# Altium PCB Misko 3.PcbDoc (part 2 of 4)
Units mm, origin at the board's own origin, x right, y up, seen from the top; angles counter-clockwise.
Board outline 128.1 x 53.3 mm, 6 copper layers (Top (LS), Mid 1 (LS), Mid 2 (GND), Mid 3 (P/HS), Mid 4 (GND), Bottom (HS)), stack 1.597 mm thick; 230 components, 214 nets, 896 pads, 500 vias.
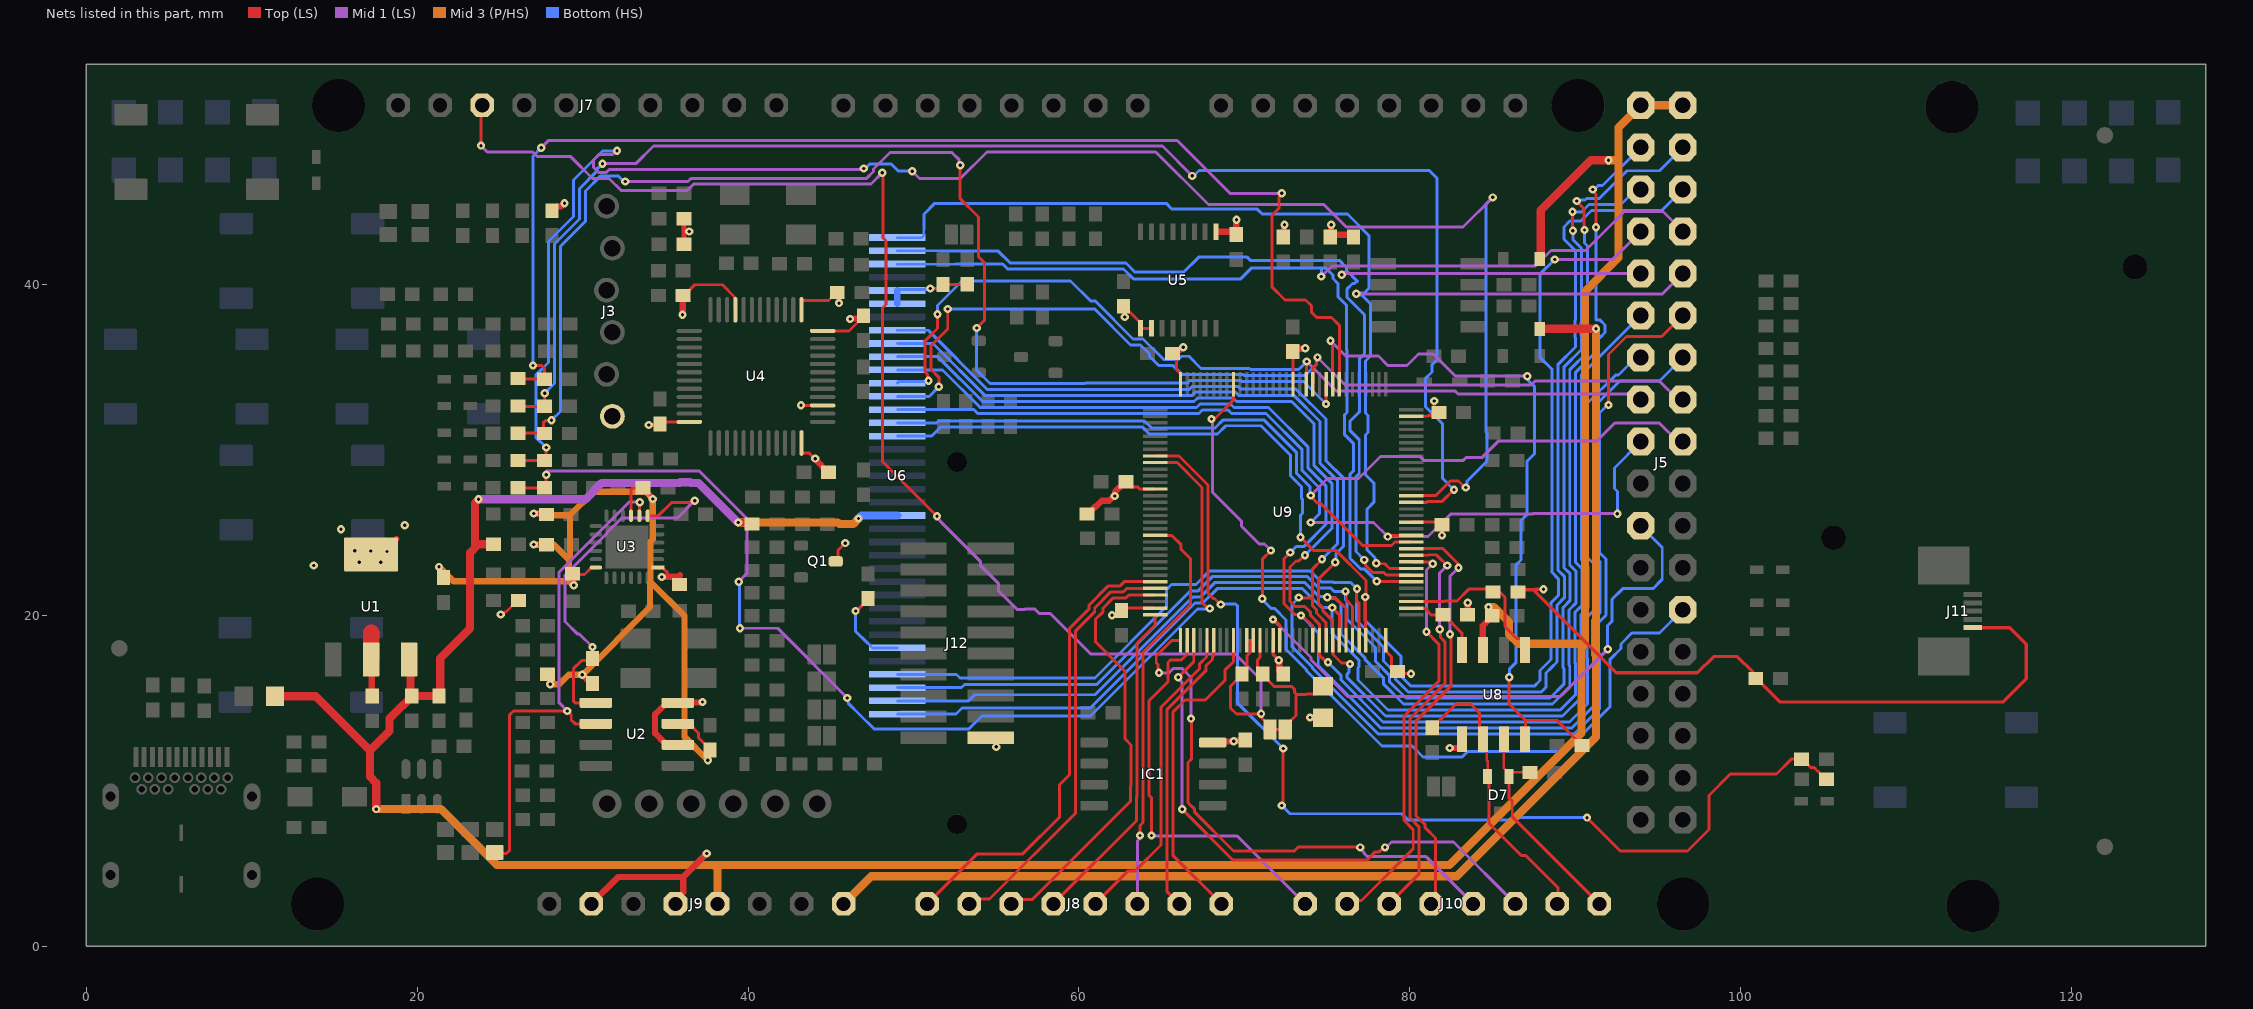
[diagram p6: the nets of this part, all layers, seen from the top]

## Via types
v1: diameter 0.5, hole 0.2, Top (LS) to Bottom (HS), tented both sides, 500 vias

## Nets (pads, with @x,y where several pads share a name; then routed paths per layer and width w, separated by ;. In a path a pad name is that pad's centre, name@x,y a point inside that pad or via, vN(x,y) a via of type N, cw(c..) or ccw(c..) an arc to the next point about the centre after c; other vN are vias at no path point)
+3V3: C17.2 C18.2 C19.2 C20.2 C21.2 C27.2 C28.2 C29.2 C30.2 C39.2 C53.2 C54.2 C55.2 C56.2 C57.2 C58.2 C59.2 C60.2 FB2.2 IC1.8 J3.6 J9.2 J9.4 J11.5 J12.1 Q1.3 R26.1 R41.1 R47.2 R52.2 R57.1 R58.1 R59.1 R62.1 R63.1 R93.1 R95.1 U2.6 U2.8 U4.1 U4.9 U4.24 U4.36 U4.39 U4.48 U5.1 U5.9 U5.10 U6.6 U6.32 U6.33 U8.5 U9.13 U9.31 U9.47 U9.64 U9.79 U9.95 U9.111 U9.128 | length 129.1
  Top (LS) w0.18: v1(34,31.5) 34.617,31.5 C18.2@34.675,31.557 34.8,31.682 U4.24@36.456,31.682 ; C19.2@36.078,39.321 36.128,39.321 36.778,39.97 38.455,39.97 39.218,39.208 39.218,38.471 U4.9@39.231,38.457 ; v1(43.2,32.682) U4.39@44.506,32.682 ; U4.36@43.231,30.407 43.231,29.843 43.264,29.811 43.672,29.811 44.019,29.464 v1(44.06,29.464) ; U4.1@43.231,38.457 43.231,38.985 43.264,39.017 44.856,39.017 45.34,39.502 C20.2@45.39,39.502 ; U4.48@44.506,37.182 46.106,37.182 C21.2@46.828,37.904 ; Q1.3@45.441,23.371 45.441,23.922 v1(45.876,24.356) ; v1(51.01,39.748) 51.51,39.748 51.528,39.73 51.798,40 R52.2@53.25,40 ; J12.1@54.665,12.6 54.72,12.6 55,12.32 v1(55,12.04) ; v1(62,20) 62.28,20 62.703,20.423 U9.31@64.598,20.423 ; C28.2@62.687,38.671 62.687,38.621 62.997,38.311 63.089,38.311 63.725,37.675 U5.9@63.725,37.332 U5.10@64.375,37.332 ; C57.2@62.864,27.982 63.097,27.749 63.557,27.749 63.673,27.633 64.588,27.633 U9.13@64.598,27.623 ; C58.2@65.6,35.581 65.81,35.581 65.879,35.511 65.879,34.855 66.126,34.609 66.126,33.971 U9.128@66.136,33.961 ; U9.47@71.736,18.485 71.736,17.616 v1(72.077,17.274) 72.077,16.712 C56.2@72.345,16.444 ; U9.111@72.936,33.961 72.936,35.929 C59.2@72.944,35.938 ; U9.64@78.536,18.485 78.546,18.475 78.546,17.837 78.89,17.493 78.89,16.91 79.2,16.6 C54.2@79.25,16.6 79.445,16.405 79.509,16.469 v1(80.069,16.469) ; U9.79@80.074,25.623 81.79,25.623 82,25.413 81.935,25.348 v1(81.935,24.823) ; U9.95@80.074,32.023 81.043,32.023 81.092,32.072 81.508,32.072 C60.2@81.718,32.282 ; v1(81.47,32.95) 81.47,32.53 C60.2@81.75,32.25
  Top (LS) w0.2: v1(46.5,20.25) 46.55,20.25 47.25,20.95 C30.2@47.25,21 ; R63.1@86.524,21.395 86.66,21.532 87.549,21.532 87.586,21.569 v1(88.069,21.569) ; 87.461,21.532 92.478,16.515 97.373,16.515 98.359,17.5 99.796,17.5 100.728,16.568 100.728,16.34 C39.2@100.9,16.168 100.95,16.168 102.368,14.75 115.843,14.75 117.25,16.157 117.25,18.25 116.25,19.25 J11.5@114.013,19.25
  Top (LS) w0.3: R41.1@36.128,42.414 36.128,43.187 ; R26.1@36.128,43.96 36.128,43.187 ; v1(36.445,43.187) 36.128,43.187
  Top (LS) w0.381: R47.2@28.152,44.443 28.152,44.493 28.362,44.703 28.681,44.703 28.878,44.9 v1(28.91,44.9) ; J9.2@30.534,2.554 32.161,4.18 36.08,4.18 ; J9.4@35.614,2.554 35.614,2.798 36.08,3.264 36.08,4.18 ; U2.6@35.791,12.192 35.708,12.274 34.961,12.274 34.38,12.855 34.38,14.015 35.115,14.75 35.277,14.75 35.299,14.728 37.227,14.728 v1(37.25,14.75) ; v1(36.043,38.164) 36.06,38.181 36.06,39.253 C19.2@36.128,39.321 ; v1(37.5,5.6) 36.08,4.18 ; v1(44.06,29.464) 44.083,29.441 44.083,29.383 44.82,28.646 C17.2@44.87,28.646 ; C20.2@45.39,39.502 45.477,39.414 45.477,38.885 v1(45.5,38.862) ; v1(46.167,37.906) 46.19,37.929 46.803,37.929 C21.2@46.97,38.096 ; R93.1@60.537,26.123 60.967,26.553 61.015,26.553 61.375,26.914 61.832,26.914 62.122,27.203 v1(62.154,27.203) 62.177,27.226 62.177,27.449 62.787,28.059 C57.2@62.837,28.059 ; C58.2@65.645,35.821 65.854,36.031 66.104,36.031 66.263,36.189 v1(66.295,36.189) ; IC1.8@68.084,12.305 68.146,12.367 69.326,12.367 69.372,12.412 70.001,12.412 R95.1@70.049,12.46 ; 68.427,43.168 69.653,43.168 C27.2@69.713,43.108 ; C27.2@69.44,43.31 69.513,43.383 69.513,43.887 v1(69.525,43.9) ; v1(72.077,17.274) 72.098,17.253 C56.2@72.098,16.577 ; R57.1@72.347,42.847 72.394,42.894 72.394,43.577 v1(72.417,43.6) ; C59.2@72.931,35.925 72.936,35.929 73.118,36.112 73.648,36.112 v1(73.671,36.134) ; v1(73.964,13.814) 73.971,13.807 74.743,13.807 FB2.2@74.75,13.8 ; R58.1@75.18,42.847 75.227,42.894 75.227,43.577 v1(75.25,43.6) ; R58.1@75.25,43 R59.1@76.667,43 ; v1(82.4,11.972) 83.091,11.972 83.138,12.019 U8.5@83.138,12.494 ; R62.1@83.491,20.023 v1(83.491,20.748)
  Bottom (HS) w0.15: U6.33@49.022,39.623 U6.33@49.085,39.686 ; v1@50.948,39.686 v1(51.01,39.748)
  Bottom (HS) w0.18: v1(46.5,20.25) 46.5,19.035 47.202,18.333 47.212,18.333 47.522,18.023 U6.6@49.022,18.023 ; v1@50.924,39.748 v1(51.01,39.748)
  Bottom (HS) w0.2: U6.33@49.085,39.686 v1@50.948,39.686
  Bottom (HS) w0.4: U6.32@49.022,38.823 U6.33@49.022,39.623
  other v1: 69.349,12.39 62.772,38.02
+3V3HUB: C6.2 C7.2 C8.2 C14.2 C15.2 C16.2 R6.1 R8.2 R15.2 R17.1 R18.2 U1.2 U1.4 U2.7 U3.1 U3.9 U3.18 | length 72.2
  Top (LS) w0.18: v1(25.05,20.038) 25.136,20.038 25.286,20.188 25.367,20.188 26.067,20.888 R6.1@26.117,20.888 ; v1(27.043,26.151) 27.751,26.151 R17.1@27.809,26.093 ; v1(27.051,24.277) 27.805,24.277 R18.2@27.825,24.257 ; C14.2@29.381,22.504 29.402,22.483 29.431,22.454 30.116,22.454 30.526,22.863 30.786,22.863 U3.18@30.806,22.882 ; U3.9@32.931,26.008 32.931,26.594 32.92,26.605 32.92,27.595 33.025,27.7 C15.2@33.65,27.7 ; C15.2@33.657,27.743 34.178,27.222 34.178,27.087 v1(34.239,27.026) ; U3.1@34.557,22.882 34.587,22.853 34.847,22.853 35.141,22.559 35.141,22.435 ; U2.7@35.755,13.435 36.44,13.435 37.01,12.865 37.01,12.59 37.68,11.92 C8.2@37.68,11.87
  Top (LS) w0.381: U1.4@17.081,23.626 17.377,23.626 v1(17.803,23.2) ; U1.2@17.219,17.325 17.25,17.294 17.25,15.155 C6.2@17.282,15.123 ; U1.4@17.883,23.12 17.883,23.739 U1.4@18.75,24.606 ; R8.2@27.882,16.436 28.019,16.299 28.019,15.846 v1(28.042,15.823) ; C14.2@29.402,22.483 29.449,22.436 29.449,21.826 v1(29.472,21.804) ; v1(29.982,16.406) 29.994,16.406 30.6,15.8 R15.2@30.6,15.75 ; v1(34.782,22.309) 34.805,22.332 35.807,22.332 35.889,22.414 ; v1(37.573,11.227) 37.596,11.25 37.596,11.746 C8.2@37.7,11.85 C8.2@37.68,11.87
  Top (LS) w1: U1.2@17.219,17.325 17.219,18.949
  Mid 3 (P/HS) w0.381: v1(21.326,22.919) 22.198,22.047 29.178,22.047 ; v1(27.043,26.151) 28.097,26.151 28.213,26.035 29.235,26.035 ; v1(27.051,24.277) 27.071,24.257 28.271,24.257 29.178,23.35 ; v1@28.074,15.823 28.576,15.823 29.159,16.406 30.002,16.406 34.07,20.474 34.07,21.991 34.1,22.021 ; v1(29.472,21.804) 29.44,21.804 29.196,22.047 29.178,22.047 ; v1(37.573,11.227) 36.16,12.641 36.16,19.962 34.1,22.021 ; 29.178,22.047 29.178,23.35 ; 29.178,23.35 29.235,23.407 29.235,26.035 ; 29.235,26.035 30.669,27.47 33.815,27.47 34.227,27.058 34.239,27.058 34.239,24.577 34.1,24.438 34.1,22.021
  other v1: 13.75,23 16.5,23.2 18.18,23.848 17.203,23.875 16.225,23.902 15.4,25.2 19.25,25.432
+5: C4.2 C5.2 C38.2 D3.2 FB1.2 J5.1 J5.2 J9.5 R14.2 R32.1 U1.3 U6.16 U8.3 | length 201.9
  Top (LS) w0.381: U8.3@84.408,17.894 84.408,19.359 C38.2@85.072,20.023 ; v1(84.75,20.5) 84.773,20.477 84.773,20.322 C38.2@85.072,20.023 ; C38.2@85.122,20.023 C38.2@85.072,20.023
  Top (LS) w0.5: FB1.2@11.418,15.1 13.88,15.1 17.152,11.828 ; v1(17.526,8.28) 17.526,9.867 17.152,10.241 17.152,11.828 ; U1.3@19.519,17.325 19.594,17.25 19.594,14.998 19.119,14.523 19.082,14.523 18.33,13.771 18.33,13.007 17.578,12.254 17.152,11.828 ; C4.2@19.669,15.123 19.682,15.123 19.685,15.121 21.321,15.121 C5.2@21.323,15.119 21.39,15.185 21.39,17.39 23.191,19.191 23.191,20.296 23.2,20.305 23.2,23.773 23.716,24.29 R14.2@24.616,24.29 ; 23.5,24.29 23.5,26.787 v1(23.713,27) ; v1(39.4,25.6) 40.156,25.6 R32.1@40.239,25.517 ; D3.2@87.859,41.524 87.915,41.58 87.915,44.475 90.94,47.5 v1(92,47.5)
  Mid 1 (LS) w0.5: v1(23.713,27) 30.171,27 31.157,27.986 35.853,27.986 35.905,28.038 36.485,28.038 36.537,27.986 37.014,27.986 v1(39.4,25.6)
  Mid 3 (P/HS) w0.5: v1(17.526,8.28) 21.433,8.28 24.813,4.9 37.954,4.9 ; J9.5@38.154,2.554 38.154,4.7 37.954,4.9 ; v1(39.4,25.6) 45.426,25.6 45.517,25.509 46.359,25.509 46.68,25.83 v1(46.68,25.844) ; v1(84.75,20.5) 85.071,20.5 85.987,19.583 85.987,18.839 86.549,18.278 88.559,18.278 88.565,18.272 90.575,18.272 ; v1(92,47.5) 92.577,47.5 92.61,47.533 ; J5.2@96.492,50.813 J5.1@93.952,50.813 92.61,49.47 92.61,47.533 ; 37.954,4.9 82.394,4.9 90.366,12.872 90.366,18.013 90.575,18.223 90.575,18.272 ; 90.575,18.272 90.575,36.996 90.55,37.021 90.55,37.601 90.575,37.626 90.575,39.575 92.61,41.61 92.61,47.533
  Bottom (HS) w0.5: v1(46.68,25.844) 46.86,26.023 U6.16@49.022,26.023
+12: D4.2 J9.8 | length 77.7
  Top (LS) w0.5: D4.2@87.86,37.311 v1(91.25,37.311)
  Mid 3 (P/HS) w0.5: J9.8@45.774,2.554 47.441,4.22 82.829,4.22 91.245,12.636 91.245,17.973 91.25,17.978 v1(91.25,37.311)
AD0: J8.1 U9.27 | length 28.3
  Top (LS) w0.18: J8.1@50.828,2.554 53.849,5.575 56.608,5.575 58.818,7.785 58.818,9.759 59.439,10.379 59.439,19.206 60.593,20.36 60.593,20.591 61.774,21.772 62.489,21.772 62.74,22.023 U9.27@64.598,22.023
AD1: J8.2 U9.28 | length 25.7
  Top (LS) w0.18: J8.2@53.368,2.554 53.663,2.849 54.599,2.849 59.799,8.049 59.799,19.057 60.953,20.211 60.953,20.442 61.923,21.412 62.694,21.412 62.905,21.623 U9.28@64.598,21.623
AD2: J8.3 U9.29 | length 26
  Top (LS) w0.18: J8.3@55.908,2.554 56.174,2.819 57.183,2.819 63.112,8.748 63.112,9.668 63.15,9.707 63.15,12.153 62.79,12.513 62.79,16.6 60.985,18.406 60.985,19.734 61.46,20.209 61.46,20.44 62.073,21.052 62.843,21.052 63.014,21.223 U9.29@64.598,21.223
AD3: J8.4 U9.32 | length 20
  Top (LS) w0.18: J8.4@58.448,2.554 63.472,7.578 63.472,9.009 63.51,9.047 63.51,18.31 64.598,19.398 U9.32@64.598,20.023
AD4: J8.5 U9.37 | length 19
  Top (LS) w0.18: J8.5@60.988,2.554 62.985,4.55 63.396,4.55 64.95,6.105 64.95,14.436 67.296,16.782 67.296,17.068 67.702,17.475 67.702,17.625 67.726,17.649 67.726,18.475 U9.37@67.736,18.485
AD5: J8.6 U9.20 | length 25.1
  Top (LS) w0.18: v1(63.682,6.687) 63.684,6.688 63.684,7.28 63.87,7.467 63.87,17.764 66.75,20.644 66.75,23.401 66.178,23.973 66.178,24.251 65.605,24.823 U9.20@64.598,24.823
  Mid 1 (LS) w0.18: J8.6@63.528,2.554 63.528,6.343 63.627,6.442 63.627,6.632 v1(63.682,6.687)
AD6: J8.7 U9.38 | length 17.4
  Top (LS) w0.18: J8.7@66.068,2.554 65.31,3.312 65.31,14.287 67.662,16.64 67.662,16.926 68.062,17.326 68.062,17.476 68.136,17.549 U9.38@68.136,18.485
AD7: J8.8 U9.41 | length 19.4
  Top (LS) w0.18: J8.8@68.608,2.554 65.695,5.466 65.695,14.163 66.412,14.88 67.63,14.88 68.838,16.088 68.838,16.697 69.336,17.194 U9.41@69.336,18.485
AD8: J10.1 U9.34 | length 24.2
  Top (LS) w0.18: v1(64.382,6.687) 64.382,8.968 64.23,9.121 64.23,14.836 65.379,15.985 65.379,17.143 65.537,17.301 66.199,17.301 66.526,17.627 66.526,18.475 U9.34@66.536,18.485
  Mid 1 (LS) w0.18: v1(64.382,6.687) 64.409,6.661 69.559,6.661 J10.1@73.666,2.554
AD9: J10.2 U9.73 | length 25.5
  Top (LS) w0.18: J10.2@76.206,2.554 76.41,2.758 77.082,2.758 80.202,5.878 80.202,7.04 79.64,7.602 79.64,13.892 81.75,16.002 81.75,18.25 v1(81,19) ; U9.73@80.074,23.223 81.179,23.223 81.29,23.113 v1(81.376,23.113)
  Mid 1 (LS) w0.18: v1(81,19) 81,22.736 v1(81.376,23.113)
AD10: J10.3 U9.74 | length 25.1
  Top (LS) w0.18: J10.3@78.746,2.554 80.562,4.37 80.562,7.189 80,7.751 80,13.743 82.11,15.853 82.11,18.399 81.859,18.65 81.859,19.097 v1(81.797,19.158) ; U9.74@80.074,23.623 81.123,23.623 81.153,23.653 81.575,23.653 81.627,23.6 81.653,23.6 v1(82.251,23.001)
  Mid 1 (LS) w0.18: v1(81.797,19.158) 81.797,22.547 v1(82.251,23.001)
AD11: J10.4 U9.75 | length 25.5
  Top (LS) w0.18: U9.75@80.074,24.023 81.993,24.023 82.877,23.139 82.877,22.93 v1(82.939,22.869) ; J10.4@81.286,2.554 81.551,2.819 81.551,6.532 80.922,7.162 80.922,7.338 80.36,7.9 80.36,13.594 82.47,15.704 82.47,18.803 v1(82.425,18.848)
  Mid 1 (LS) w0.18: v1(82.425,18.848) 82.425,22.355 v1(82.939,22.869)
ARDUINO_CS: J5.21 U9.48 | length 35.3
  Top (LS) w0.18: v1(71.72,19.743) 71.78,19.743 72.136,19.387 U9.48@72.136,18.485
  Mid 1 (LS) w0.18: v1(71.72,19.743) 74.022,17.441 74.022,17.314 76.262,15.074 89.075,15.074 v1(91.949,17.948)
  Bottom (HS) w0.18: v1(91.949,17.948) 91.948,17.949 91.948,19.366 92.209,19.627 92.209,20.959 92.856,21.606 94.69,21.606 95.25,22.165 95.25,24.098 93.952,25.396 J5.21@93.952,25.413
AREF: C51.2 C52.2 FB2.1 J7.8 SB7.1 SB7.2 U9.43 U9.44 U9.45 | length 95.3
  Top (LS) w0.18: v1(23.861,48.38) 23.861,50.747 J7.8@23.934,50.82 ; v1(48.115,46.742) 48.158,46.699 48.158,42.803 48.335,42.626 48.335,38.774 48.126,38.564 48.126,29.271 v1(51.419,25.978) ; U9.43@70.136,18.485 70.336,18.485 ; U9.44@70.536,18.485 70.336,18.485 ; U9.45@70.936,18.485 70.936,17.442 70.8,17.306 70.8,16.744 C52.2@71.1,16.444 71.1,16.394 71.79,15.704 72.845,15.704 72.865,15.684 73.035,15.514 73.035,15.32 73.141,15.215 73.728,15.215 ; SB7.1@72.46,13.1 SB7.2@71.54,13.1 71.54,13.3 71.068,13.772 71.068,13.983 v1(71.006,14.044) 70.985,14.023 69.519,14.023 69.162,14.38 69.162,15.71 69.852,16.4 C51.2@69.852,16.45 70.162,16.76 70.162,17.561 70.336,17.734 70.336,18.485 ; SB7.1@72.46,13.3 72.77,13.61 72.774,13.61 73.108,13.945 73.108,15.105 73.214,15.21 73.724,15.21 73.728,15.215 ; FB2.1@74.75,15.7 74.29,15.24 73.754,15.24 73.728,15.215
  Mid 1 (LS) w0.18: v1(23.861,48.38) 24.241,48 26.986,48 27.276,47.71 29.29,47.71 30.603,46.397 31.603,46.397 32.33,45.67 36.329,45.67 36.715,46.056 47.429,46.056 v1(48.115,46.742) ; v1(51.419,25.978) 51.419,25.892 51.644,25.667 51.644,25.645 54.035,23.254 54.035,23.013 55.15,21.899 55.15,21.462 56.264,20.348 56.711,20.348 56.725,20.362 57.346,20.362 57.618,20.089 58.277,20.089 60.723,17.643 69.46,17.643 71.006,16.096 v1(71.006,14.044)
BC_EN1: R15.1 U2.1 U3.7 | length 23.6
  Top (LS) w0.18: v1(30.593,18.072) 30.593,17.257 30.586,17.25 29.93,17.25 29.442,16.762 29.442,14.813 29.55,14.705 U2.1@30.805,14.705 ; U3.7@33.931,26.008 34.579,26.008 35.369,26.798 36.419,26.798 36.469,26.848 36.724,26.848 v1(36.785,26.909)
  Mid 1 (LS) w0.18: v1(30.593,18.072) 29.79,18.876 29.674,18.876 28.932,19.618 28.932,22.414 31.476,24.958 31.476,24.987 32.375,25.885 35.729,25.885 36.753,26.909 v1(36.785,26.909)
BTN.DOWN: C44.2 R87.1 U9.83 | length 105.7
  Top (LS) w0.18: R87.1@26.09,29.35 26.098,29.342 C44.2@27.7,29.342 27.8,29.442 v1(27.8,30.133) ; U9.83@80.074,27.223 80.084,27.233 80.912,27.233 80.922,27.243 81.572,27.243 82.442,28.114 82.934,28.114 83.335,27.713 v1(83.376,27.713)
  Mid 1 (LS) w0.18: v1(32.078,48.066) 32.049,48.066 31.813,47.83 30.975,47.83 30.659,47.514 30.659,47.066 30.975,46.75 31.422,46.75 31.611,46.939 46.939,46.939 v1(47,47) ; v1(49.915,46.832) 50.361,46.386 52.82,46.386 54.434,48 64.636,48 67.823,44.814 74.8,44.814 76.154,43.46 83.21,43.46 v1(85,45.25)
  Bottom (HS) w0.18: v1(27.8,30.133) 27.173,30.76 27.173,34.505 27.94,35.271 27.94,42.59 29.45,44.1 29.45,46.305 31.199,48.054 32.066,48.054 v1(32.078,48.066) ; v1(47,47) 47.087,47 47.369,47.282 48.638,47.282 49.089,46.832 v1(49.915,46.832) ; v1(83.376,27.713) 83.438,27.774 83.438,28.087 84.66,29.309 84.66,31.027 84.6,31.087 84.6,44.85 v1(85,45.25)
BTN.ESC: C49.2 R92.1 U9.8 | length 64
  Top (LS) w0.18: U9.8@64.598,29.623 66.044,29.623 67.801,27.866 67.801,21.297 68.095,21.003 68.191,21.003 68.548,20.647 v1(68.57,20.647) ; v1(72.25,8.5) 72.311,8.561 72.311,8.737 72.34,8.765 v1(72.34,11.947) ; v1(90.704,7.767) 90.704,7.76 92.714,5.75 96.777,5.75 98.069,7.042 98.069,9.107 99.361,10.399 102.149,10.399 103.051,11.301 R92.1@103.674,11.301 ; R92.1@103.724,11.301 104.243,10.781 104.433,10.781 104.603,10.611 104.614,10.611 105.134,10.091 C49.2@105.184,10.091
  Bottom (HS) w0.18: v1(68.57,20.647) 68.572,20.649 68.795,20.649 68.824,20.678 69.467,20.678 69.572,20.573 69.572,14.715 v1(72.34,11.947) ; v1(72.25,8.5) 72.75,8 79.5,8 79.867,7.633 86.162,7.633 86.289,7.76 90.697,7.76 v1(90.704,7.767)
BTN.LEFT: C45.2 R88.1 U9.104 | length 77.4
  Top (LS) w0.18: R88.1@26.09,34.3 26.123,34.267 C45.2@27.7,34.267 27.7,34.937 27.542,35.095 v1(27,35.095) ; v1(72.26,45.5) 72.26,45.413 72.08,45.233 72.08,44.58 71.657,44.157 71.657,39.843 72.445,39.055 73.693,39.055 74.05,38.697 74.05,38.306 74.367,37.99 75.267,37.99 75.736,37.521 U9.104@75.736,34.014
  Mid 1 (LS) w0.18: v1(27.5,48.25) 27.95,48.7 65.92,48.7 69.12,45.5 v1(72.26,45.5)
  Bottom (HS) w0.18: v1(27,35.095) 27,47.75 v1(27.5,48.25)
BTN.OK: C48.2 R91.1 U9.9 | length 67.8
  Top (LS) w0.18: R91.1@26.09,27.7 C48.2@27.7,27.7 27.8,27.8 v1(27.8,28.492) ; U9.9@64.598,29.223 65.935,29.223 67.441,27.717 67.441,20.746 67.567,20.62 67.603,20.62 67.822,20.401 v1(67.908,20.401)
  Mid 1 (LS) w0.18: v1@27.81,28.712 37.052,28.712 39.94,25.824 39.94,22.536 v1(39.429,22.025) ; v1(39.512,19.211) 41.789,19.211 v1(46,15)
  Bottom (HS) w0.18: v1(39.429,22.025) 39.471,21.983 39.471,19.253 v1(39.512,19.211) ; v1(46,15) 46.055,14.945 46.055,14.68 46.74,13.995 47.605,13.13 53.36,13.13 54.132,13.902 60.694,13.902 67.162,20.37 67.878,20.37 v1(67.908,20.401)
BTN.RIGHT: C47.2 R90.1 U9.106 | length 78.5
  Top (LS) w0.18: R90.1@26.09,31 C47.2@27.683,31 ; C47.2@27.7,30.983 C47.2@27.683,31 ; v1(28.12,31.775) 28.104,31.759 27.755,31.759 27.65,31.653 27.65,31.033 C47.2@27.683,31 ; v1(52.82,47.196) 52.82,45.171 53.929,44.062 53.929,42.081 53.94,42.07 53.94,41.652 54.3,41.292 54.3,37.838 v1(53.814,37.352) ; v1(74.933,32.766) 74.934,32.767 74.934,33.96 U9.106@74.936,33.961
  Mid 1 (LS) w0.18: v1(32.574,46.21) 36.374,46.21 36.57,46.406 47.17,46.406 47.575,46.812 47.575,46.966 48.577,47.968 52.316,47.968 52.759,47.525 52.759,47.257 v1(52.82,47.196)
  Bottom (HS) w0.18: v1(28.12,31.775) 28.66,32.315 28.66,42.292 30.17,43.802 30.17,45.631 31.07,46.532 32.166,46.532 32.488,46.21 v1(32.574,46.21) ; v1(53.814,37.352) 53.814,34.803 54.617,34 60.36,34 60.381,34.021 66.537,34.021 66.711,34.195 69.761,34.195 69.832,34.123 73.575,34.123 v1(74.933,32.766)
BTN.UP: C43.2 R86.1 U9.82 | length 92.4
  Top (LS) w0.18: R86.1@26.09,32.65 26.115,32.625 C43.2@27.7,32.625 27.713,32.638 v1(27.713,33.417) ; U9.82@80.074,26.823 81.012,26.823 81.072,26.883 81.947,26.883 82.638,27.574 v1(82.666,27.574)
  Mid 1 (LS) w0.18: v1(31.199,47.29) 33.219,47.29 34.279,48.35 65.05,48.35 v1(66.85,46.55)
  Bottom (HS) w0.18: v1(27.713,33.417) 28.3,34.003 28.3,42.441 29.81,43.951 29.81,45.78 30.828,46.798 30.828,46.919 v1(31.199,47.29) ; v1(66.85,46.55) 66.925,46.55 67.255,46.88 81.169,46.88 81.637,46.411 81.637,35.443 81.337,35.143 81.337,34.695 80.93,34.288 80.93,32.61 81.967,31.572 81.967,28.272 v1(82.666,27.574)
CAN2_RX: R62.2 U8.4 U9.66 | length 4.7
  Top (LS) w0.18: U9.66@80.074,20.423 80.084,20.413 80.931,20.413 81.101,20.243 81.101,20.193 81.271,20.023 82.041,20.023 83.138,18.927 U8.4@83.138,17.894
CAN2_TX: R63.2 U8.1 U9.67 | length 10
  Top (LS) w0.18: U9.67@80.074,20.823 82.073,20.823 82.113,20.863 82.843,20.863 83.549,21.569 85.096,21.569 85.261,21.569 85.75,21.08 85.75,20.509 85.734,20.493 85.734,19.453 85.75,19.437 85.75,19.307 86.268,18.789 86.268,18.785 86.474,18.579 86.738,18.579 86.948,18.369 U8.1@86.948,17.894
CAN_STBY: R66.1 U8.8 U9.105 | length 43.3
  Top (LS) w0.18: v1(75.196,36.59) 75.196,36.504 75.336,36.364 U9.105@75.336,33.961 ; v1(86,16.25) 86,14.638 86.988,13.65 ; U8.8@86.948,12.494 86.988,12.534 86.988,13.65 ; R66.1@90.395,12.132 90.345,12.132 90.035,12.442 90.035,12.492 88.876,13.65 86.988,13.65
  Mid 1 (LS) w0.18: v1(75.196,36.59) 76.126,35.66 78.102,35.66 78.668,35.094 79.831,35.094 80.526,35.79 81.404,35.79 82.745,34.449 v1(87.094,34.449)
  Bottom (HS) w0.18: v1(86,16.25) 86.029,16.279 86.029,16.77 86.421,17.162 86.421,23.042 86.71,23.331 86.71,25.724 87.09,26.103 87.09,27.775 87.088,27.776 87.088,29.324 87.54,29.776 87.54,33.803 87.156,34.187 87.156,34.387 v1(87.094,34.449)
CANH: D7.1 J10.8 R64.1 U8.7 | length 14.1
  Top (LS) w0.15: U8.7@85.678,12.494 85.678,10.747 86,10.425 86,10.3 86.2,10.5 87.2,10.5 R64.1@87.25,10.5
  Top (LS) w0.18: D7.1@86,10.25 86,8.935 86.185,8.75 86.185,7.815 J10.8@91.446,2.554 ; R64.1@86.89,10.19 R64.1@87.2,10.5
CANL: D7.2 J10.7 R65.1 U8.6 | length 17.4
  Top (LS) w0.15: U8.6@84.52,12.381 84.633,12.269 84.633,11.243 84.7,11.176 D7.2@84.7,10.25
  Top (LS) w0.18: R65.1@81.35,13.198 81.35,13.248 81.66,13.558 81.71,13.558 82.782,14.63 83.655,14.63 84.198,14.087 84.198,12.704 U8.6@84.408,12.494 U8.6@84.52,12.381 ; D7.2@84.7,10.25 84.785,10.165 84.785,7.43 86.732,5.482 86.996,5.482 88.944,3.535 88.944,2.592 J10.7@88.906,2.554
CUR_LIMIT: LED2.1 U2.2 U3.8 | length 31.1
  Top (LS) w0.18: LED2.1@24.69,5.658 24.748,5.6 25.398,5.6 25.592,5.794 25.592,13.98 25.822,14.21 v1(29.08,14.21) 29.315,13.975 29.315,13.67 29.55,13.435 U2.2@30.805,13.435 ; U3.8@33.431,26.008 33.443,26.019 33.443,26.812 v1(33.46,26.829)
  Mid 1 (LS) w0.18: v1(29.08,14.21) 28.582,14.708 28.582,22.606 32.805,26.829 v1(33.46,26.829)
DAC1: J10.5 U9.33 | length 33
  Top (LS) w0.18: v1(64.839,16.52) 64.778,16.581 64.778,17.022 64.67,17.13 64.67,17.538 65.617,18.485 U9.33@66.136,18.485 ; v1(66.775,13.75) 66.814,13.712 66.814,11.323 66.595,11.105 66.595,8.668 66.969,8.295 66.969,8.127 69.346,5.75 73.009,5.75 73.25,5.991 76.976,5.991 v1(77,5.967)
  Mid 1 (LS) w0.18: v1(64.839,16.52) 65.44,16.52 65.71,16.79 66.224,16.79 66.775,16.238 v1(66.775,13.75) ; v1(77,5.967) 77,5.904 77.227,5.677 77.227,5.61 77.41,5.427 80.953,5.427 J10.5@83.826,2.554
DAC2: J10.6 U9.35 | length 34.1
  Top (LS) w0.18: v1(66,16.25) 66.936,17.186 U9.35@66.936,18.485 ; v1(66.235,8.265) 69.29,5.21 77.42,5.21 77.907,5.697 78.144,5.697 78.413,5.967 v1(78.5,5.967)
  Mid 1 (LS) w0.18: v1(66,16.25) 66,16.163 66.235,15.928 v1(66.235,8.265) ; v1(78.5,5.967) 78.563,5.967 78.886,6.29 82.63,6.29 J10.6@86.366,2.554
FLASH_CS: J5.26 U9.120 | length 51.5
  Top (LS) w0.18: v1(68.004,31.855) 68.065,31.916 68.247,31.916 69.326,32.994 69.326,33.951 U9.120@69.336,33.961 ; v1(71.077,20.988) 71.077,23.388 v1(71.599,23.91)
  Mid 1 (LS) w0.18: v1(68.004,31.855) 68.065,31.794 68.065,31.525 68.069,31.52 68.069,27.428 69.82,25.678 69.82,25.378 70.896,24.302 71.206,24.302 v1(71.599,23.91)
  Bottom (HS) w0.18: v1(71.077,20.988) 71.077,20.947 71.61,20.415 71.812,20.415 72.517,19.709 72.517,17.942 73.74,16.719 73.74,16.656 78.306,12.09 80.138,12.09 80.796,11.432 83.161,11.432 83.479,11.75 89.377,11.75 92.104,14.477 92.104,17.339 92.758,17.994 92.758,18.266 93.413,18.921 95.08,18.921 J5.26@96.492,20.333
FMC_D0: J5.18 U6.23 U9.76 | length 60.7
  Top (LS) w0.18: v1(74.001,27.231) 74.001,27.181 74.391,26.791 74.561,26.791 77.142,24.21 78.884,24.21 79.097,24.423 U9.76@80.074,24.423
  Mid 1 (LS) w0.18: v1(74.001,27.231) 75.026,28.256 76.893,28.256 78.226,29.589 80.6,29.589 80.829,29.36 83.226,29.36 83.384,29.518 84.344,29.518 85.366,30.54 91.304,30.54 92.384,31.621 95.072,31.621 96.2,30.493 J5.18@96.492,30.493
  Bottom (HS) w0.18: U6.23@49.022,31.623 51.391,31.623 51.51,31.742 63.967,31.742 64.394,31.315 68.227,31.315 68.722,31.809 71.173,31.809 73.132,29.85 73.132,28.589 73.97,27.751 73.97,27.263 v1(74.001,27.231)
FMC_D1: J5.17 U6.24 U9.77 | length 56.7
  Top (LS) w0.18: v1(78.66,24.75) 78.747,24.75 78.82,24.823 U9.77@80.074,24.823
  Mid 1 (LS) w0.18: v1(74.011,25.604) 77.806,25.604 v1(78.66,24.75) 81.098,24.75 82.476,26.128 87.431,26.128 87.438,26.135 v1(92.54,26.135)
  Bottom (HS) w0.18: U6.24@49.022,32.423 53.648,32.423 53.881,32.19 67.252,32.19 67.456,32.395 69.015,32.395 69.22,32.19 71.301,32.19 73.492,29.999 73.492,28.738 74.541,27.689 74.541,26.134 v1(74.011,25.604) ; v1(92.54,26.135) 92.54,27.481 92.36,27.661 92.36,28.9 J5.17@93.952,30.493
FMC_D2: J5.16 U6.25 U9.108 | length 57.9
  Top (LS) w0.18: v1(51.529,33.807) 51.529,34.383 51.062,34.85 51.062,36.284 52.069,37.291 v1(52.069,38.5) ; U9.108@74.136,33.961 74.136,34.938 74.358,35.16 74.358,35.519 v1(74.419,35.581)
  Mid 1 (LS) w0.18: v1(74.419,35.581) 76.091,33.909 87.318,33.909 87.57,34.161 95.072,34.161 96.2,33.033 J5.16@96.492,33.033
  Bottom (HS) w0.18: U6.25@49.022,33.223 50.946,33.223 v1(51.529,33.807) ; v1(52.069,38.5) 60.957,38.5 63.121,36.336 63.719,36.336 64.261,35.794 64.261,35.643 64.803,35.101 65.664,35.101 66.21,34.555 69.91,34.555 69.981,34.483 73.681,34.483 74.358,35.16 74.358,35.519 v1(74.419,35.581)
FMC_D3: J5.15 U6.26 U9.109 | length 55.1
  Top (LS) w0.18: v1(50.906,34.173) 50.844,34.234 50.844,34.559 50.702,34.701 50.702,36.588 51.446,37.331 v1(51.446,38.181) ; U9.109@73.736,33.961 73.746,33.971 73.746,35.311 v1(73.765,35.331)
  Mid 1 (LS) w0.18: v1(73.765,35.331) 75.538,33.559 82.705,33.559 82.902,33.362 93.623,33.362 J5.15@93.952,33.033
  Bottom (HS) w0.18: v1(50.906,34.173) 50.862,34.217 50.779,34.133 U6.26@49.132,34.133 ; v1(51.446,38.181) 51.446,38.709 52.936,40.2 59.491,40.2 60.708,38.983 60.983,38.983 63.27,36.696 63.868,36.696 65.103,35.461 66.007,35.461 66.195,35.649 66.643,35.649 67.377,34.915 70.292,34.915 70.363,34.843 73.278,34.843 v1(73.765,35.331) ; U6.26@49.132,34.133 U6.26@49.022,34.023 U6.26@49.132,34.133
FMC_D4: J5.14 U6.27 U9.53 | length 88.5
  Top (LS) w0.18: v1(72.767,23.792) 72.389,23.414 72.389,20.692 73.035,20.046 73.37,20.046 v1@73.432,19.985 ; v1@73.483,19.985 74.126,19.343 74.126,18.495 U9.53@74.136,18.485
  Bottom (HS) w0.18: U6.27@49.022,34.823 51.757,34.823 54.031,32.55 67.103,32.55 67.307,32.755 69.164,32.755 69.369,32.55 71.45,32.55 73.852,30.148 73.852,28.887 74.917,27.822 74.917,25.475 73.607,24.164 73.139,24.164 v1(72.767,23.792) ; v1(73.417,19.985) 74.46,18.942 74.46,16.955 78.225,13.19 89.799,13.19 91.1,14.491 91.1,17.523 91.048,17.575 91.048,19.712 91.489,20.152 91.489,23.243 91.1,23.632 91.1,32.574 92.687,34.161 95.08,34.161 J5.14@96.492,35.573
FMC_D5: J5.13 U6.28 U9.54 | length 85.1
  Top (LS) w0.18: v1(73.664,23.627) 73.626,23.627 73.277,23.279 73.112,23.279 72.749,22.916 72.749,20.841 73.066,20.525 73.641,20.525 74,20.166 74,19.977 74.526,19.452 74.526,18.495 74.546,18.475 74.546,17.554 74.673,17.427 74.695,17.427 74.968,17.155 v1(75.055,17.155)
  Bottom (HS) w0.18: U6.28@49.022,35.623 51.467,35.623 54.18,32.91 66.953,32.91 67.158,33.115 69.313,33.115 69.518,32.91 72.854,32.91 74.212,31.552 74.212,29.036 75.277,27.971 75.277,25.24 v1(73.664,23.627) ; v1(75.055,17.155) 75.848,16.362 75.848,16.076 78.374,13.55 89.65,13.55 90.74,14.64 90.74,17.374 90.688,17.426 90.688,19.861 91.129,20.302 91.129,23.094 90.74,23.483 90.74,32.823 92.438,34.521 92.609,34.521 93.66,35.573 J5.13@93.952,35.573
FMC_D6: J5.12 U6.29 U9.55 | length 95.2
  Top (LS) w0.18: v1(73.289,21.065) 73.311,21.044 74.021,21.044 74.103,20.961 ; v1(74.687,23.381) 74.687,23.36 74.103,22.777 74.103,20.961 ; U9.55@74.936,18.485 74.936,19.551 74.36,20.126 74.36,20.329 74.103,20.586 74.103,20.961 ; v1(92,32.7) 92,35.75 93.088,36.838 95.217,36.838 J5.12@96.492,38.113
  Bottom (HS) w0.18: U6.29@49.022,36.423 51.176,36.423 54.329,33.27 66.804,33.27 67.009,33.475 69.463,33.475 69.667,33.27 73.003,33.27 74.572,31.701 74.572,29.185 75.637,28.12 75.637,24.332 v1(74.687,23.381) ; v1(73.289,21.065) 72.877,20.653 72.877,18.091 74.1,16.868 74.1,16.806 78.076,12.83 89.948,12.83 91.46,14.342 91.46,17.673 91.408,17.724 91.408,19.562 91.849,20.003 91.849,23.392 91.46,23.781 91.46,32.224 91.936,32.7 v1(92,32.7)
FMC_D7: J5.11 U6.30 U9.56 | length 86.6
  Top (LS) w0.18: v1(75.488,23.192) 74.463,22.168 74.463,20.735 74.76,20.438 74.76,20.235 75.336,19.66 U9.56@75.336,18.485 75.346,18.475 75.346,17.627 75.865,17.108 76.32,17.108 v1(76.377,17.051)
  Bottom (HS) w0.18: U6.30@49.022,37.223 49.024,37.221 50.887,37.221 54.478,33.63 66.655,33.63 66.86,33.835 69.612,33.835 69.785,33.661 73.121,33.661 74.932,31.85 74.932,29.334 75.997,28.269 75.997,24.182 75.527,23.712 75.527,23.231 v1(75.488,23.192) ; v1(76.377,17.051) 76.315,16.99 76.315,16.545 76.208,16.437 76.208,16.225 78.523,13.91 89.228,13.91 90.38,15.062 90.38,17.225 90.328,17.277 90.328,20.01 90.769,20.451 90.769,22.945 90.38,23.334 90.38,34.54 J5.11@93.94,38.1
FMC_D8: J5.3 U6.1 U9.57 | length 87.5
  Top (LS) w0.18: v1(75.3,20.459) 75.736,20.024 U9.57@75.736,18.485 ; v1(91.05,45.723) 91.05,45.636 91.25,45.436 v1(91.25,43.439)
  Bottom (HS) w0.18: U6.1@49.022,14.023 52.561,14.023 52.929,14.392 60.674,14.392 67.013,20.73 67.474,20.73 68.349,21.605 73.513,21.605 74.659,20.459 v1(75.3,20.459) ; v1@75.253,20.359 75.3,20.311 75.3,18.895 76.917,17.279 76.917,16.873 76.866,16.822 76.866,16.076 78.672,14.27 89.079,14.27 90.02,15.211 90.02,17.076 89.968,17.128 89.968,20.159 90.409,20.6 90.409,22.795 90.02,23.184 90.02,34.69 91.25,35.92 91.25,36.771 91.474,36.771 91.79,37.088 91.79,37.535 91.474,37.851 91.25,37.851 v1(91.25,43.439) ; v1(91.05,45.723) 91.137,45.723 91.381,45.967 91.646,45.967 J5.3@93.952,48.273
FMC_D9: J5.4 U6.2 U9.58 | length 90
  Top (LS) w0.18: v1(75.003,21.093) 75.065,21.032 75.523,21.032 76.136,20.419 U9.58@76.136,18.485 ; v1(90.078,45.028) 90.078,45.012 90.524,44.565 90.524,43.304 v1(90.549,43.279)
  Bottom (HS) w0.18: U6.2@49.022,14.823 53.333,14.823 53.701,15.192 60.965,15.192 66.864,21.09 67.325,21.09 68.2,21.965 73.662,21.965 74.483,21.144 74.952,21.144 75.065,21.032 75.491,21.032 75.84,20.683 75.84,18.865 77.277,17.428 77.277,17.341 78.395,16.223 78.395,15.851 79.616,14.63 88.612,14.63 89.66,15.678 89.66,16.927 89.608,16.979 89.608,20.308 90.049,20.749 90.049,22.646 89.66,23.035 89.66,34.839 90.73,35.909 90.73,37.068 90.71,37.088 90.71,37.535 90.73,37.555 90.73,42.32 90.549,42.501 v1(90.549,43.279) ; v1(90.078,45.028) 90.139,45.089 90.579,45.089 90.673,45.183 91.446,45.183 93.124,46.861 95.08,46.861 J5.4@96.492,48.273
FMC_D10: J5.5 U6.3 U9.59 | length 85.5
  Top (LS) w0.18: v1(76.109,21.438) 76.153,21.395 76.153,20.911 76.536,20.528 U9.59@76.536,18.485 ; v1(89.825,44.375) 89.837,44.362 89.837,43.253 v1(89.85,43.24)
  Bottom (HS) w0.18: U6.3@49.022,15.623 52.901,15.623 53.095,15.817 61.081,15.817 66.715,21.45 67.176,21.45 68.051,22.325 73.811,22.325 74.503,21.633 75.227,21.633 75.421,21.438 v1(76.109,21.438) ; v1@76.123,21.424 76.114,21.414 76.114,20.918 76.2,20.832 76.2,19.758 77.914,18.045 77.914,17.213 78.755,16.372 78.755,16 79.765,14.99 88.463,14.99 89.3,15.827 89.3,16.778 89.248,16.83 89.248,20.457 89.689,20.898 89.689,22.497 89.3,22.886 89.3,34.988 90.37,36.058 90.37,36.918 90.35,36.938 90.35,37.684 90.37,37.704 90.37,42.171 89.85,42.691 v1(89.85,43.24) ; v1(89.825,44.375) 89.829,44.371 90.37,44.371 90.822,44.823 92.75,44.823 93.66,45.733 J5.5@93.952,45.733
FMC_D11: J5.6 U6.4 U9.60 | length 88.1
  Top (LS) w0.18: v1(76.8,21.6) 76.76,21.56 76.76,20.876 76.936,20.701 U9.60@76.936,18.485
  Bottom (HS) w0.18: U6.4@49.022,16.423 52.596,16.423 52.812,16.207 60.962,16.207 65.276,20.521 65.276,21.54 65.593,21.856 67.072,21.856 67.901,22.685 73.96,22.685 74.653,21.993 75.376,21.993 75.386,21.983 76.417,21.983 v1(76.8,21.6) 76.76,21.56 76.76,19.708 78.4,18.068 78.4,17.236 79.115,16.521 79.115,16.149 79.914,15.35 87.926,15.35 88.22,15.644 88.22,16.505 88.536,16.821 88.888,17.172 88.888,20.606 89.329,21.047 89.329,22.348 88.94,22.737 88.94,35.137 90.01,36.207 90.01,36.769 89.99,36.789 89.99,37.833 90.01,37.853 90.01,42.022 89.31,42.722 89.31,43.464 89.666,43.819 90.328,43.819 90.971,44.463 95.222,44.463 J5.6@96.492,45.733
FMC_D12: J5.7 U6.22 U9.61 | length 86.2
  Top (LS) w0.18: v1(73.383,24.704) 74.166,23.921 75.522,23.921 77.34,22.104 v1@77.34,21.114 ; v1@77.326,21.1 77.326,18.495 U9.61@77.336,18.485
  Mid 1 (LS) w0.18: v1(88.75,41.5) 92.259,41.5 J5.7@93.952,43.193
  Bottom (HS) w0.18: U6.22@49.022,30.823 51.1,30.823 51.659,31.382 63.818,31.382 64.245,30.955 68.377,30.955 68.871,31.449 71.008,31.449 72.772,29.685 72.772,28.44 73.461,27.75 73.461,27.044 73.521,26.983 73.521,26.179 73.383,26.04 v1(73.383,24.704) ; v1(77.3,21.1) 77.3,19.677 79.475,17.502 79.475,16.298 80.063,15.71 87.521,15.71 87.86,16.049 87.86,16.654 88.528,17.322 88.528,20.755 88.969,21.196 88.969,22.199 88.58,22.588 88.58,34.866 87.85,35.596 87.85,40.6 v1(88.75,41.5)
FMC_D13: J5.8 U6.35 U9.70 | length 73.8
  Top (LS) w0.18: v1(78,22.054) 78.031,22.023 U9.70@80.074,22.023
  Mid 1 (LS) w0.18: v1(74.646,40.467) 75.288,41.109 87.595,41.109 88.526,42.04 90.615,42.04 92.971,44.396 95.289,44.396 J5.8@96.492,43.193
  Bottom (HS) w0.15: U6.35@49.022,41.223 52.552,41.223
  Bottom (HS) w0.18: 52.552,41.223 55.387,41.223 55.69,40.92 62.692,40.92 63.282,40.33 66.506,40.33 66.529,40.307 69.753,40.307 70.439,40.992 74.646,40.992 ; v1(74.646,40.467) 74.646,40.992 ; v1(78,22.054) 77.274,22.78 77.046,22.78 76.381,23.444 76.381,28.522 76.578,28.719 76.578,30.384 76.033,30.93 76.033,32.084 76.193,32.244 76.193,36.013 76.179,36.026 76.179,38.722 75.643,39.258 75.643,40.05 75.348,40.345 75.348,40.545 74.901,40.992 74.646,40.992
FMC_D14: J5.9 U6.36 U9.71 | length 69.7
  Top (LS) w0.18: v1(77.247,23.343) 77.308,23.281 77.308,23.027 77.74,22.594 78.406,22.594 78.577,22.423 U9.71@80.074,22.423
  Mid 1 (LS) w0.18: v1(75.888,40.569) 75.975,40.569 76.059,40.653 J5.9@93.952,40.653
  Bottom (HS) w0.15: U6.36@49.022,42.023 51.554,42.023
  Bottom (HS) w0.18: 51.554,42.023 55.096,42.023 55.84,41.28 62.841,41.28 63.391,40.73 66.323,40.73 67.233,41.64 70.165,41.64 70.38,41.425 75.763,41.425 76.17,41.019 76.17,40.834 ; v1(75.888,40.569) 75.904,40.569 76.17,40.834 ; 76.798,40.125 76.742,40.125 76.657,40.04 76.526,40.04 76.21,39.724 76.21,39.201 77.259,38.152 77.259,35.807 76.963,35.51 76.963,32.311 76.393,31.741 76.393,31.144 76.938,30.598 76.938,28.57 76.741,28.373 76.741,23.848 v1(77.247,23.343) ; 76.818,40.186 76.17,40.834
FMC_D15: J5.10 U6.37 U9.72 | length 75.1
  Top (LS) w0.18: v1(77.964,23.134) 77.989,23.109 78.484,23.109 78.77,22.823 U9.72@80.074,22.823
  Mid 1 (LS) w0.18: v1(76.75,39.424) 95.264,39.424 J5.10@96.492,40.653
  Bottom (HS) w0.15: U6.37@49.022,42.823 50.507,42.823 50.632,42.948 50.632,43.302
  Bottom (HS) w0.18: 50.632,43.302 50.632,44.239 51.282,44.889 65.28,44.889 65.629,44.54 70.776,44.54 71.076,44.24 76.224,44.24 77.54,42.924 77.54,39.774 77.251,39.486 76.811,39.486 v1(76.75,39.424) ; v1@76.79,39.384 76.811,39.363 77.08,39.363 77.619,38.824 77.619,35.658 77.323,35.361 77.323,32.225 77.473,32.075 77.473,31.041 77.323,30.891 77.323,28.481 77.821,27.982 77.821,26.826 77.4,26.405 77.4,23.953 77.903,23.45 77.903,23.195 v1(77.964,23.134)